# EAGLE board Question 2- 4 Bit Counter Using 555 IC Timer (EAGLE 9.7.0)

Size 153.38 x 73.93 mm. Coordinates in mm from the lower left corner, seen from the top.
Outline: 0,0 153.38,0 153.38,73.93 0,73.93 0,0
Copper layers (1*16): Top 0.035mm / dielectric 1.5mm / Bottom 0.035mm
Design rules "default": minimum track width 6mil, minimum drill 0.35mm, track to track 6mil, track to pad 6mil, pad to pad 6mil, via to via 6mil, smd to smd 6mil, copper to edge 40mil, drill to drill 6mil, minimum pad ring 10mil, minimum via ring 8mil, stop-mask expansion 4mil, vias tented up to drill 0mil, thermal gap 10mil

## Footprints (pad centres in the part's own frame; a part is rotated, then mirrored left to right if it is on the bottom)
CAP-THRU-2.54MM = drill 1.016 pad 1.88: 1 -1.27,0; 2 1.27,0
LEDRD254W60D565H860B = drill 0.981 pad 1.581: 1 -1.27,0; 2 1.27,0
BATTERY-GENERIC = drill 1.118 pad 3.15 octagon: + 2.54,0; - -2.54,0
RESAD1016W63L850D250B = drill 0.83 pad 1.43: 1 -5.08,0; 2 5.08,0
DIP826W53P254L959H508Q8B = drill 0.786 pad 1.386: 1 -4.13,3.81; 2 -4.13,1.27; 3 -4.13,-1.27; 4 -4.13,-3.81; 5 4.13,-3.81; 6 4.13,-1.27; 7 4.13,1.27; 8 4.13,3.81
DIP762W53P254L1969H508Q14B = drill 0.743 pad 1.343: 1 -3.81,7.62; 2 -3.81,5.08; 3 -3.81,2.54; 4 -3.81,0; 5 -3.81,-2.54; 6 -3.81,-5.08; 7 -3.81,-7.62; 8 3.81,-7.62; 9 3.81,-5.08; 10 3.81,-2.54; 11 3.81,0; 12 3.81,2.54; 13 3.81,5.08; 14 3.81,7.62

## Placement (x,y rotation side)
C1  1u  [CAP-THRU-2.54MM]  7.62,5.97 0 top
D1  RED  [LEDRD254W60D565H860B]  124.46,28.83 180 top
D2  RED  [LEDRD254W60D565H860B]  132.08,28.83 180 top
D3  RED  [LEDRD254W60D565H860B]  139.7,28.83 180 top
D5  RED  [LEDRD254W60D565H860B]  147.32,28.83 180 top
P2  BATTERYGENERIC  [BATTERY-GENERIC]  139.39,65.68 180 top
R1  1k  [RESAD1016W63L850D250B]  16.51,11.05 0 top
R2  1k  [RESAD1016W63L850D250B]  8.89,33.91 90 top
R3  470k  [RESAD1016W63L850D250B]  13.97,26.29 0 top
R4  1k  [RESAD1016W63L850D250B]  123.19,36.45 90 top
R5  1k  [RESAD1016W63L850D250B]  130.81,36.45 90 top
R6  1k  [RESAD1016W63L850D250B]  138.43,36.45 90 top
R7  1k  [RESAD1016W63L850D250B]  146.05,36.45 90 top
U1  LM555_DIP  [DIP826W53P254L959H508Q8B]  10.16,17.4 90 top
U2  74HC74_PDIP  [DIP762W53P254L1969H508Q14B]  34.29,17.4 90 top
U5  74HC74_PDIP  [DIP762W53P254L1969H508Q14B]  102.87,17.4 90 top

## Library data of the parts
C1 P2 R1-R7 U2 U5 = Tinkercad
D1-D3 D5 = Tinkercad; CATEGORY: Opto-Electronic; SUB-CATEGORY: LED; VALUE: LED_RED
U1 = Tinkercad; CATEGORY: IC_Clock-Timing; CURRENT-SUPPLY: 10mA; DESCRIPTION: IC OSC SINGLE TIMER 100KHZ 8-DIP; FREQUENCY: 100kHz; MANUFACTURER: Texas Instruments; MPN: LM555CN/NOPB; OPERATING_TEMP: 0°C to 70°C; PART_STATUS: Active; ROHS_COMPLIANT: ROHS3 Compliant; SUB-CATEGORY: Timer

## Nets
D1_C: D1.2 R4.1
D2_C: D2.2 R5.1
D3_C: D3.2 R6.1
D5_C: D5.2 R7.1
P2+: P2.+ R2.2 U1.4 U1.8 U2.1 U2.4 U2.10 U2.13 U2.14 U5.1 U5.4 U5.10 U5.13 U5.14
P2-: C1.1 P2.- R4.2 R5.2 R6.2 R7.2 U1.1 U2.7 U5.7
U1_DIS: R2.1 R3.1 U1.7
U1_OUT: R1.1 U1.3
U1_THR: C1.2 R3.2 U1.2 U1.6
U2_1!Q: U2.2 U2.6
U2_1Q: D1.1 U2.5 U2.11
U2_2Q: D2.1 U2.9 U5.3
U2_CLK1: R1.2 U2.3
U2_D2: U2.8 U2.12
U5_1!Q: U5.2 U5.6
U5_1Q: D3.1 U5.5 U5.11
U5_2!Q: U5.8 U5.12
U5_2Q: D5.1 U5.9

## Tracks (layer width: path | path; a pad name or v marks a point on that pad's centre or on a via)
D1_C  (1 unrouted)
D2_C  (1 unrouted)
D3_C  (1 unrouted)
D5_C  (1 unrouted)
P2+  (13 unrouted)
P2-  (8 unrouted)
U1_DIS  (2 unrouted)
U1_OUT  (1 unrouted)
U1_THR  (3 unrouted)
U2_1!Q  (1 unrouted)
U2_1Q  (2 unrouted)
U2_2Q  (2 unrouted)
U2_CLK1  (1 unrouted)
U2_D2  (1 unrouted)
U5_1!Q  (1 unrouted)
U5_1Q  (2 unrouted)
U5_2!Q  (1 unrouted)
U5_2Q  (1 unrouted)